# Altium PCB PCB2.PcbDoc (part 2 of 3)
Units mil, origin at the board's own origin, x right, y up, seen from the top; angles counter-clockwise.
Board outline 7178.34 x 3937 mil, 2 copper layers (Top Layer, Bottom Layer); 141 components, 57 nets, 393 pads, 76 vias.
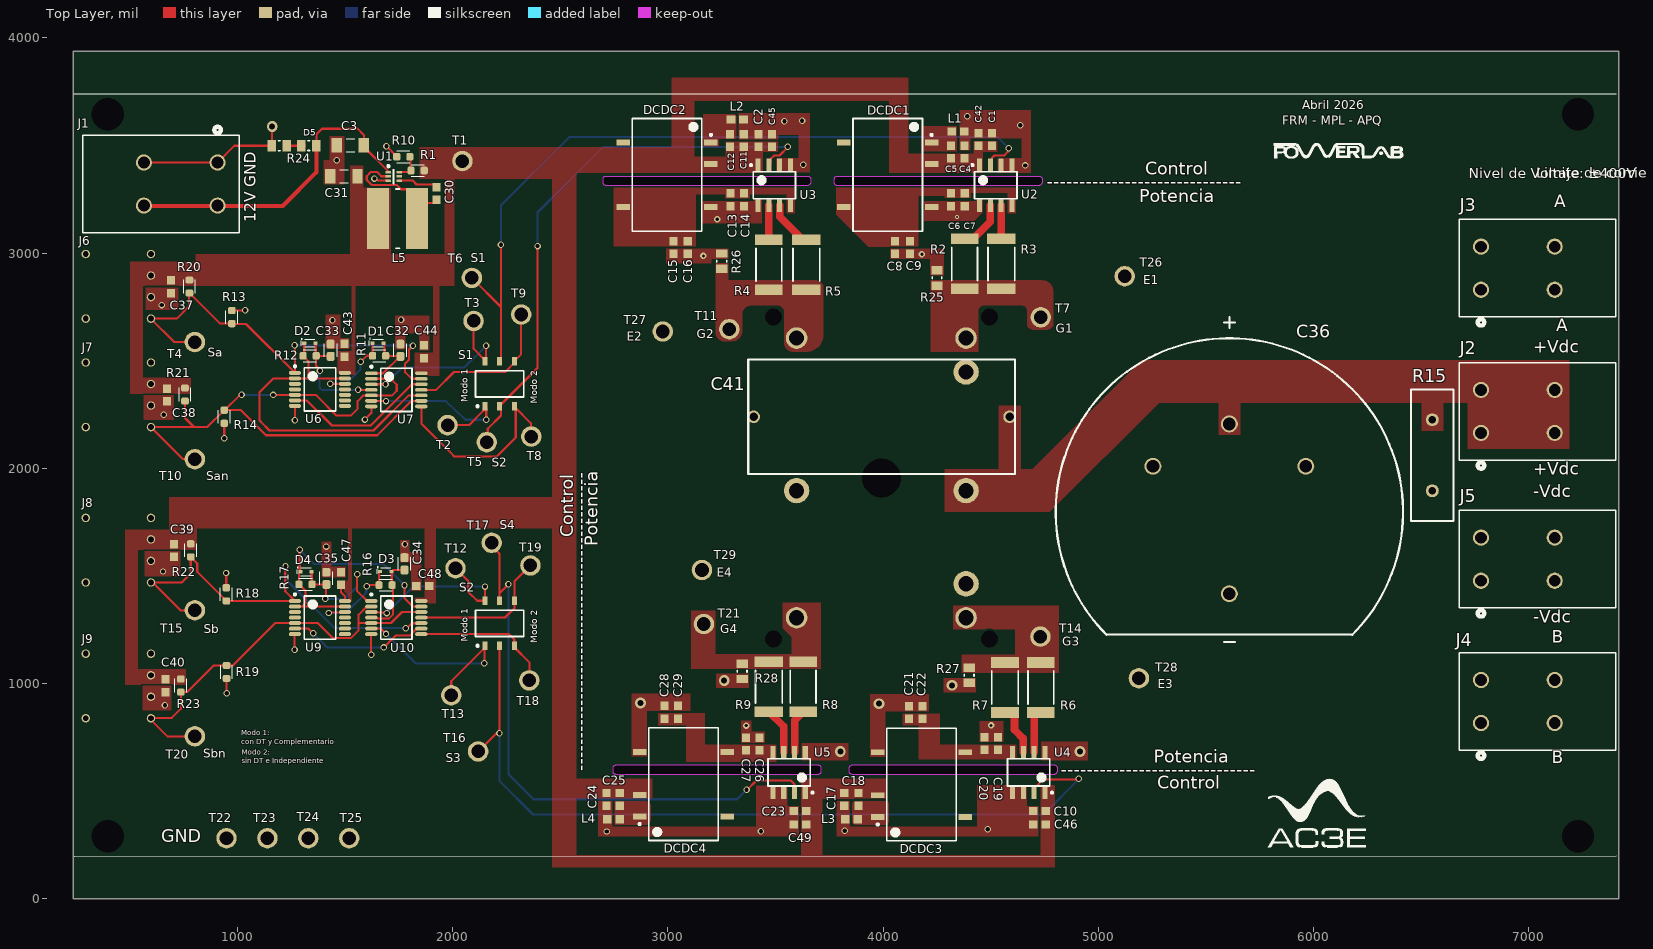
[diagram p0: Top Layer view]

## Part data (continued)
L5: library part INDUC_Murata_29332C, "Inductor Power Shielded Bobbin Core 3.3uH 10KHz 4A 0.028Ohm DCR T/R", .Max DC Current=4A, .RMS Current (Irms)=#NAME?, .Value=28mΩ, Case/Package=2828, Manufacturer="Murata Power Solutions", Manufacturer Part Number=29332C, Max Operating Temperature=85°C, Min Operating Temperature=-40°C, Supplier Part Number 1=580-29332C, Test Frequency=10kHz, Category="Fixed Inductors", China RoHS=Compliant, ComponentLink1Description=https://datasheet.octopart.com:443/29332C-Murata-Power-Solutions-datasheet-10978166.pdf?src-supplier=Newark, ComponentLink1URL=https://datasheet.octopart.com:443/29332C-Murata-Power-Solutions-datasheet-10978166.pdf?src-supplier=Newark, ComponentLink2Description=https://datasheet.octopart.com:443/29332C-Murata-Power-Solutions-datasheet-8448240.pdf?src-supplier=Newark, ComponentLink2URL=https://datasheet.octopart.com:443/29332C-Murata-Power-Solutions-datasheet-8448240.pdf?src-supplier=Newark, ComponentLink3Description=https://datasheet.octopart.com:443/29332C-Murata-Power-Solutions-datasheet-22087498.pdf?src-supplier=element14+APAC, ComponentLink3URL=https://datasheet.octopart.com:443/29332C-Murata-Power-Solutions-datasheet-22087498.pdf?src-supplier=element14+APAC, ComponentLink4Description=http://sigma.octopart.com:80/reach_statement/Murata-company-16.pdf?src-supplier=Compliance+Statements, ComponentLink4URL=http://sigma.octopart.com:80/reach_statement/Murata-company-16.pdf?src-supplier=Compliance+Statements, Composition=Wirewound, Current Rating=4A, DC Resistance (DCR)=28mΩ, Depth=7.2mm, Export Control Classification Number (ECCN) Code=EAR99, Harmonized Tariff Schedule (HTS) Code=8504.50.80.00, Height=4mm, Height - Seated (Max)=3.9878mm, Inductance=3.3µH, Introduction Date=2009-03-23, Lead Free="Lead Free", Length=7.2mm, Lifecycle Status=Production, Max Current Rating=4A, Max DC Current=4A, Mount="Surface Mount", Number of Circuits=1, Number of Pins=2, Number of Terminals=2, Pricing 1="1=0,55, 10=0,543, 50=0,543, 100=0,543, 1000=0,48, 10000=0,48 (USD)", Radiation Hardening=No, REACH SVHC=Yes, Resistance=28mΩ, RoHS=Compliant, Shielding=Shielded, Stock 1=1763, Supplier 1=Mouser, Termination=SMD/SMT, Width=7.2mm
R1: library part CRCW060352K3FKEA, "100mW Thick Film Resistors 75V ±1% ±100ppm/℃ 52.3kΩ 0603 Chip Resistor - Surface Mount ROHS", .Case/Package=0603, .Tolerance=1%, Manufacturer=Vishay, Max Operating Temperature=155°C, Max Power Dissipation=100mW, Min Operating Temperature=-55°C, Supplier Part Number 1=71-CRCW0603-52.3K-E3, Temperature Coefficient=100ppm/°C, Voltage Rating=75V, Case Code (Imperial)=0603, Case/Package=0603, Category="Chip SMD Resistors", China RoHS=Non-Compliant, ComponentLink1Description=https://datasheet.octopart.com:443/CRCW060352K3FKEA-Vishay-datasheet-175423584.pdf?src-supplier=IHS, ComponentLink1URL=https://datasheet.octopart.com:443/CRCW060352K3FKEA-Vishay-datasheet-175423584.pdf?src-supplier=IHS, ComponentLink2Description=https://datasheet.octopart.com:443/CRCW060352K3FKEA-Vishay-datasheet-62316122.pdf?src-supplier=Future+Electronics, ComponentLink2URL=https://datasheet.octopart.com:443/CRCW060352K3FKEA-Vishay-datasheet-62316122.pdf?src-supplier=Future+Electronics, ComponentLink3Description=https://datasheet.octopart.com:443/CRCW060352K3FKEA-Vishay-datasheet-5300368.pdf?src-supplier=Future+Electronics, ComponentLink3URL=https://datasheet.octopart.com:443/CRCW060352K3FKEA-Vishay-datasheet-5300368.pdf?src-supplier=Future+Electronics, ComponentLink4Description=https://datasheet.octopart.com:443/CRCW060352K3FKEA.-Vishay-datasheet-83961561.pdf?src-supplier=Newark, ComponentLink4URL=https://datasheet.octopart.com:443/CRCW060352K3FKEA.-Vishay-datasheet-83961561.pdf?src-supplier=Newark, ComponentLink5Description=https://datasheet.octopart.com:443/CRCW060352K3FKEA-Vishay-datasheet-66077789.pdf?src-supplier=Newark, ComponentLink5URL=https://datasheet.octopart.com:443/CRCW060352K3FKEA-Vishay-datasheet-66077789.pdf?src-supplier=Newark, ComponentLink6Description=https://datasheet.octopart.com:443/CRCW060352K3FKEA-Vishay-datasheet-11761042.pdf?src-supplier=Newark, ComponentLink6URL=https://datasheet.octopart.com:443/CRCW060352K3FKEA-Vishay-datasheet-11761042.pdf?src-supplier=Newark, ComponentLink7Description=https://datasheet.octopart.com:443/CRCW060352K3FKEA-Vishay-datasheet-11516975.pdf?src-supplier=Newark, ComponentLink7URL=https://datasheet.octopart.com:443/CRCW060352K3FKEA-Vishay-datasheet-11516975.pdf?src-supplier=Newark, ComponentLink8Description=https://datasheet.octopart.com:443/CRCW060352K3FKEA-Vishay-datasheet-159614168.pdf?src-supplier=Newark, ComponentLink8URL=https://datasheet.octopart.com:443/CRCW060352K3FKEA-Vishay-datasheet-159614168.pdf?src-supplier=Newark, ComponentLink9Description=https://datasheet.octopart.com:443/CRCW060352K3FKEA-Vishay-datasheet-33013972.pdf?src-supplier=Newark, ComponentLink9URL=https://datasheet.octopart.com:443/CRCW060352K3FKEA-Vishay-datasheet-33013972.pdf?src-supplier=Newark, ComponentLink10Description=https://datasheet.octopart.com:443/CRCW060352K3FKEA-Vishay-datasheet-21268114.pdf?src-supplier=Newark, ComponentLink10URL=https://datasheet.octopart.com:443/CRCW060352K3FKEA-Vishay-datasheet-21268114.pdf?src-supplier=Newark, ComponentLink11Description=https://datasheet.octopart.com:443/CRCW060352K3FKEA-Vishay-datasheet-21226360.pdf?src-supplier=Newark, ComponentLink11URL=https://datasheet.octopart.com:443/CRCW060352K3FKEA-Vishay-datasheet-21226360.pdf?src-supplier=Newark, ComponentLink12Description=https://datasheet.octopart.com:443/CRCW060352K3FKEA-Vishay-datasheet-62317937.pdf?src-supplier=element14+APAC, ComponentLink12URL=https://datasheet.octopart.com:443/CRCW060352K3FKEA-Vishay-datasheet-62317937.pdf?src-supplier=element14+APAC, ComponentLink13Description=https://datasheet.octopart.com:443/CRCW060352K3FKEA.-Vishay-datasheet-78776209.pdf?src-supplier=element14+APAC, ComponentLink13URL=https://datasheet.octopart.com:443/CRCW060352K3FKEA.-Vishay-datasheet-78776209.pdf?src-supplier=element14+APAC, ComponentLink14Description=https://datasheet.octopart.com:443/CRCW060352K3FKEA-Vishay-datasheet-14722531.pdf?src-supplier=element14+APAC, ComponentLink14URL=https://datasheet.octopart.com:443/CRCW060352K3FKEA-Vishay-datasheet-14722531.pdf?src-supplier=element14+APAC, ComponentLink15Description=https://datasheet.octopart.com:443/CRCW060352K3FKEA-Vishay-datasheet-5299586.pdf?src-supplier=element14+APAC, ComponentLink15URL=https://datasheet.octopart.com:443/CRCW060352K3FKEA-Vishay-datasheet-5299586.pdf?src-supplier=element14+APAC, ComponentLink16Description=https://datasheet.octopart.com:443/CRCW060352K3FKEA-Vishay-datasheet-10380026.pdf?src-supplier=element14+APAC, ComponentLink16URL=https://datasheet.octopart.com:443/CRCW060352K3FKEA-Vishay-datasheet-10380026.pdf?src-supplier=element14+APAC, ComponentLink17Description=https://datasheet.octopart.com:443/CRCW060352K3FKEA-Vishay-datasheet-137114422.pdf?src-supplier=X-ON, ComponentLink17URL=https://datasheet.octopart.com:443/CRCW060352K3FKEA-Vishay-datasheet-137114422.pdf?src-supplier=X-ON, ComponentLink18Description=https://datasheet.octopart.com:443/CRCW060352K3FKEA-Vishay-Dale-datasheet-47688880.pdf?src-supplier=RS+(Formerly+Allied+Electronics), ComponentLink18URL=https://datasheet.octopart.com:443/CRCW060352K3FKEA-Vishay-Dale-datasheet-47688880.pdf?src-supplier=RS+(Formerly+Allied+Electronics), ComponentLink19Description=https://datasheet.octopart.com:443/CRCW060352K3FKEA-Vishay-datasheet-12001583.pdf?src-supplier=RS+(Formerly+Allied+Electronics), ComponentLink19URL=https://datasheet.octopart.com:443/CRCW060352K3FKEA-Vishay-datasheet-12001583.pdf?src-supplier=RS+(Formerly+Allied+Electronics), ComponentLink20Description=https://datasheet.octopart.com:443/CRCW060352K3FKEA-Vishay-datasheet-5306405.pdf?src-supplier=RS+(Formerly+Allied+Electronics), ComponentLink20URL=https://datasheet.octopart.com:443/CRCW060352K3FKEA-Vishay-datasheet-5306405.pdf?src-supplier=RS+(Formerly+Allied+Electronics), ComponentLink21Description=https://datasheet.octopart.com:443/CRCW060352K3FKEA-Vishay-datasheet-8619608.pdf?src-supplier=element14, ComponentLink21URL=https://datasheet.octopart.com:443/CRCW060352K3FKEA-Vishay-datasheet-8619608.pdf?src-supplier=element14, ComponentLink22Description=https://datasheet.octopart.com:443/CRCW060352K3FKEA-Vishay-datasheet-5377433.pdf?src-supplier=Garrett, ComponentLink22URL=https://datasheet.octopart.com:443/CRCW060352K3FKEA-Vishay-datasheet-5377433.pdf?src-supplier=Garrett, ComponentLink23Description=https://datasheet.octopart.com:443/CRCW060352K3FKEA-Vishay-datasheet-148188.pdf?src-supplier=Garrett, ComponentLink23URL=https://datasheet.octopart.com:443/CRCW060352K3FKEA-Vishay-datasheet-148188.pdf?src-supplier=Garrett, ComponentLink24Description=https://datasheet.octopart.com:443/CRCW060352K3FKEA-Vishay-datasheet-30224.pdf?src-supplier=Garrett, ComponentLink24URL=https://datasheet.octopart.com:443/CRCW060352K3FKEA-Vishay-datasheet-30224.pdf?src-supplier=Garrett, ComponentLink25Description=http://sigma.octopart.com:80/rohs_statement/Vishay-company-15.pdf?src-supplier=Compliance+Statements, ComponentLink25URL=http://sigma.octopart.com:80/rohs_statement/Vishay-company-15.pdf?src-supplier=Compliance+Statements, Composition="Thick Film", Contact Plating=Tin, Country of Origin="Israel, Taiwan", Depth=850µm, Export Control Classification Number (ECCN) Code=EAR99, Features="Automotive AEC-Q200", Harmonized Tariff Schedule (HTS) Code=8533.21.00.30, Height=450µm, Introduction Date=2005-02-16, Lead Free="Lead Free", Length=1.55mm, Lifecycle Status=Production, Manufacturer Part Number=CRCW060352K3FKEA, Military Standard=Not, Mount="Surface Mount", Number of Pins=2, Number of Terminals=2, Number of Terminations=2, Packaging="Cut Tape", Power Dissipation=100mW, Power Rating=100mW, Pricing 1="1=0,1, 10=0,019, 50=0,019, 100=0,015, 1000=0,009, 10000=0,004 (USD)", Radiation Hardening=No, REACH SVHC=Yes, Resistance=52.3kΩ, RoHS=Compliant, Schedule B="8533210045, 8533210045|8533210045, 8533210045|8533210045|8533210045, 8533210045|8533210045|8533210045|8533210045", Stock 1=40752, Supplier 1=Mouser, Termination=SMD/SMT, Tolerance=1%, Weight=2.012816mg, Width=850µm, Working Voltage=75V
R2 R4 R6 R8: library part SR2512JK-0710RL, "Fixed Resistor, Metal Glaze/thick Film, 1W, 10ohm, 500V, 5% +/-Tol, 100ppm/Cel, Surface Mount, 2512", .Case/Package=2512, .Tolerance=5%, Manufacturer="Yageo Group", Max Operating Temperature=155°C, Max Power Dissipation=1W, Min Operating Temperature=-55°C, Supplier Part Number 1=603-SR2512JK-0710RL, Temperature Coefficient=100ppm/°C, Working Voltage=500V, Case/Package=2512, Category="Chip SMD Resistors", China RoHS=Non-Compliant, ComponentLink1Description=https://datasheet.octopart.com:443/SR2512JK-0710RL-Yageo-datasheet-176402240.pdf?src-supplier=Newark, ComponentLink1URL=https://datasheet.octopart.com:443/SR2512JK-0710RL-Yageo-datasheet-176402240.pdf?src-supplier=Newark, ComponentLink2Description=https://datasheet.octopart.com:443/SR2512JK-0710RL-Yageo-datasheet-166006509.pdf?src-supplier=Future+Electronics, ComponentLink2URL=https://datasheet.octopart.com:443/SR2512JK-0710RL-Yageo-datasheet-166006509.pdf?src-supplier=Future+Electronics, ComponentLink3Description=https://datasheet.octopart.com/SR2512JK-0710RL-Yageo-datasheet-11047080.pdf, ComponentLink3URL=https://datasheet.octopart.com/SR2512JK-0710RL-Yageo-datasheet-11047080.pdf, ComponentLink4Description=http://sigma.octopart.com:80/conflict_mineral_statement/Yageo-company-3.pdf?src-supplier=Compliance+Statements, ComponentLink4URL=http://sigma.octopart.com:80/conflict_mineral_statement/Yageo-company-3.pdf?src-supplier=Compliance+Statements, ComponentLink5Description=http://sigma.octopart.com:80/rohs_statement/Yageo-company-2.pdf?src-supplier=Compliance+Statements, ComponentLink5URL=http://sigma.octopart.com:80/rohs_statement/Yageo-company-2.pdf?src-supplier=Compliance+Statements, Composition="Thick Film", Features="Automotive AEC-Q200", Height=550µm, Length=6.35mm, Lifecycle Status=Production, Manufacturer Part Number=SR2512JK-0710RL, Mount="Surface Mount", Number of Terminals=2, Number of Terminations=2, Power Dissipation=1W, Pricing 1="1=0,17, 10=0,099, 50=0,089, 100=0,08, 1000=0,069, 10000=0,069 (USD)", REACH SVHC=Yes, Resistance=10Ω, RoHS=Compliant, Stock 1=10268, Supplier 1=Mouser, Tolerance=5%, Width=3.1mm
R3 R5 R7 R9: library part RMC1-3R30FTE, "Fixed Resistor, Metal Glaze/thick Film, 1W, 3.3ohm, 200V, 1% +/-Tol, 500ppm/Cel, Surface Mount, 2512", .Case/Package=2512, .Tolerance=1%, Manufacturer=Kamaya, Max Operating Temperature=155°C, Min Operating Temperature=-55°C, Power Dissipation=1W, Supplier Part Number 1=791-RMC1-3R30FTE, Temperature Coefficient=500ppm/°C, Working Voltage=200V, Case/Package=2512, Category="Chip SMD Resistors", China RoHS=Non-Compliant, ComponentLink1Description=https://datasheet.octopart.com:443/RMC1-3R30FTE-Kamaya-datasheet-182142873.pdf?src-supplier=IHS, ComponentLink1URL=https://datasheet.octopart.com:443/RMC1-3R30FTE-Kamaya-datasheet-182142873.pdf?src-supplier=IHS, Height=550µm, Lifecycle Status=Production, Manufacturer Part Number=RMC1-3R30FTE, Mount="Surface Mount", Number of Terminals=2, Pricing 1="1=0,2, 10=0,097, 50=0,097, 100=0,056, 1000=0,034, 10000=0,024 (USD)", REACH SVHC=Yes, Resistance=3.3Ω, RoHS=Compliant, Stock 1=1779, Supplier 1=Mouser, Tolerance=1%, Width=3.2mm
R10: library part "RESISTOR - GENERIC", "Chip Resistor Automotive Precision Grade Thick Film 0603 10kOhm 0.5% Paper T/R", .Case/Package=0603, .Tolerance=0.5%, Manufacturer="Yageo Group", Manufacturer Part Number=AC0603DRE0710KL, Max Operating Temperature=155°C, Min Operating Temperature=-55°C, Power Dissipation=100mW, Supplier Part Number 1=603-AC0603DRE0710KL, Temperature Coefficient=50ppm/°C, Working Voltage=75V, Case/Package=0603, Category="Chip SMD Resistors", China RoHS=Non-Compliant, ComponentLink1Description=https://datasheet.octopart.com:443/AC0603DRE0710KL-Yageo-datasheet-182189378.pdf?src-supplier=IHS, ComponentLink1URL=https://datasheet.octopart.com:443/AC0603DRE0710KL-Yageo-datasheet-182189378.pdf?src-supplier=IHS, ComponentLink2Description=https://datasheet.octopart.com:443/AC0603DRE0710KL-Yageo-datasheet-178509465.pdf?src-supplier=Newark, ComponentLink2URL=https://datasheet.octopart.com:443/AC0603DRE0710KL-Yageo-datasheet-178509465.pdf?src-supplier=Newark, ComponentLink3Description=https://datasheet.octopart.com/AC0603DRE0710KL-Yageo-datasheet-12512238.pdf, ComponentLink3URL=https://datasheet.octopart.com/AC0603DRE0710KL-Yageo-datasheet-12512238.pdf, ComponentLink4Description=http://sigma.octopart.com:80/conflict_mineral_statement/Yageo-company-3.pdf?src-supplier=Compliance+Statements, ComponentLink4URL=http://sigma.octopart.com:80/conflict_mineral_statement/Yageo-company-3.pdf?src-supplier=Compliance+Statements, ComponentLink5Description=http://sigma.octopart.com:80/rohs_statement/Yageo-company-2.pdf?src-supplier=Compliance+Statements, ComponentLink5URL=http://sigma.octopart.com:80/rohs_statement/Yageo-company-2.pdf?src-supplier=Compliance+Statements, Country of Origin="Mainland China, Taiwan", Export Control Classification Number (ECCN) Code=EAR99, Harmonized Tariff Schedule (HTS) Code=8533.21.00.30, Height=450µm, Introduction Date=2016-03-14, Length=1.6mm, Lifecycle Status=Production, Mount="Surface Mount", Number of Terminals=2, Packaging="Tape & Reel", Pricing 1="1=0,11, 10=0,061, 50=0,061, 100=0,045, 1000=0,031, 10000=0,02 (USD)", REACH SVHC=Yes, Resistance=10kΩ, RoHS=Compliant, Stock 1=3496, Supplier 1=Mouser, Tolerance=0.5%, Width=800µm
R11 R12 R16 R17: library part "RESISTOR - GENERIC", "Res Thick Film 0603 3.09K Ohm 1% 0.1W(1/10W) ±100ppm/C Pad SMD T/R", .Case/Package=0603, .Tolerance=1%, Manufacturer="Yageo Group", Manufacturer Part Number=RC0603FR-073K09L, Max Operating Temperature=155°C, Min Operating Temperature=-55°C, Power Dissipation=100mW, Supplier Part Number 1=603-RC0603FR-073K09L, Temperature Coefficient=100ppm/°C, Voltage Rating=75V, Voltage Rating (DC)=50V, Case Code (Imperial)=0603, Case/Package=0603, Category="Chip SMD Resistors", China RoHS=Non-Compliant, ComponentLink1Description=https://datasheet.octopart.com:443/RC0603FR-073K09L-Yageo-datasheet-175887523.pdf?src-supplier=Newark, ComponentLink1URL=https://datasheet.octopart.com:443/RC0603FR-073K09L-Yageo-datasheet-175887523.pdf?src-supplier=Newark, ComponentLink2Description=https://datasheet.octopart.com:443/RC0603FR-073K09L-Yageo-datasheet-103092701.pdf?src-supplier=Upverter, ComponentLink2URL=https://datasheet.octopart.com:443/RC0603FR-073K09L-Yageo-datasheet-103092701.pdf?src-supplier=Upverter, ComponentLink3Description=https://datasheet.octopart.com:443/RC0603FR-073K09L-Yageo-datasheet-164759695.pdf?src-supplier=Future+Electronics, ComponentLink3URL=https://datasheet.octopart.com:443/RC0603FR-073K09L-Yageo-datasheet-164759695.pdf?src-supplier=Future+Electronics, ComponentLink4Description=https://datasheet.octopart.com:443/RC0603FR-073K09L-Yageo-datasheet-137700087.pdf?src-supplier=Future+Electronics, ComponentLink4URL=https://datasheet.octopart.com:443/RC0603FR-073K09L-Yageo-datasheet-137700087.pdf?src-supplier=Future+Electronics, ComponentLink5Description=https://datasheet.octopart.com:443/RC0603FR-073K09L-Yageo-datasheet-15599030.pdf?src-supplier=Future+Electronics, ComponentLink5URL=https://datasheet.octopart.com:443/RC0603FR-073K09L-Yageo-datasheet-15599030.pdf?src-supplier=Future+Electronics, ComponentLink6Description=https://datasheet.octopart.com:443/RC0603FR-073K09L-Yageo-datasheet-12596169.pdf?src-supplier=Future+Electronics, ComponentLink6URL=https://datasheet.octopart.com:443/RC0603FR-073K09L-Yageo-datasheet-12596169.pdf?src-supplier=Future+Electronics, ComponentLink7Description=https://datasheet.octopart.com:443/RC0603FR-073K09L-Yageo-datasheet-8328172.pdf?src-supplier=Future+Electronics, ComponentLink7URL=https://datasheet.octopart.com:443/RC0603FR-073K09L-Yageo-datasheet-8328172.pdf?src-supplier=Future+Electronics, ComponentLink8Description=https://datasheet.octopart.com:443/RC0603FR-073K09L-Yageo-datasheet-8324193.pdf?src-supplier=Future+Electronics, ComponentLink8URL=https://datasheet.octopart.com:443/RC0603FR-073K09L-Yageo-datasheet-8324193.pdf?src-supplier=Future+Electronics, ComponentLink9Description=https://datasheet.octopart.com/RC0603FR-073K09L-Yageo-datasheet-73766026.pdf, ComponentLink9URL=https://datasheet.octopart.com/RC0603FR-073K09L-Yageo-datasheet-73766026.pdf, ComponentLink10Description=https://datasheet.octopart.com:443/RC0603FR-073K09L-Yageo-datasheet-118562.pdf?src-supplier=DigiKey, ComponentLink10URL=https://datasheet.octopart.com:443/RC0603FR-073K09L-Yageo-datasheet-118562.pdf?src-supplier=DigiKey, ComponentLink11Description=http://sigma.octopart.com:80/conflict_mineral_statement/Yageo-company-3.pdf?src-supplier=Compliance+Statements, ComponentLink11URL=http://sigma.octopart.com:80/conflict_mineral_statement/Yageo-company-3.pdf?src-supplier=Compliance+Statements, ComponentLink12Description=http://sigma.octopart.com:80/rohs_statement/Yageo-company-2.pdf?src-supplier=Compliance+Statements, ComponentLink12URL=http://sigma.octopart.com:80/rohs_statement/Yageo-company-2.pdf?src-supplier=Compliance+Statements, Composition="Thick Film", Depth=800µm, Height=450µm, Lead Free="Lead Free", Length=1.6mm, Lifecycle Status=Production, Military Standard=Not, Mount="Surface Mount", Number of Terminals=2, Packaging="Tape & Reel", Power Rating=100mW, Pricing 1="1=0,1, 10=0,007, 50=0,007, 100=0,006, 1000=0,006, 10000=0,002 (USD)", REACH SVHC=Yes, Resistance=3.09kΩ, RoHS=Compliant, Schedule B="8533210045, 8533210045|8533210045|8533210045|8533210045|8533210045", Stock 1=1028569, Supplier 1=Mouser, Termination=SMD/SMT, Tolerance=1%, Width=800µm, Working Voltage=75V
R13 R14 R18 R19: library part RC0603JR-0710KL, "Res Thick Film 0603 10K Ohm 5% 1/10W ±100ppm/°C Molded SMD SMD Paper T/R", .Case/Package=0603, .Tolerance=5%, Manufacturer="Yageo Group", Max Operating Temperature=155°C, Min Operating Temperature=-55°C, Power Dissipation=100mW, Supplier Part Number 1=603-RC0603JR-0710KL, Temperature Coefficient=100ppm/°C, Voltage Rating=50V, Working Voltage=75V, Case Code (Imperial)=0603, Case/Package=0603, Category="Chip SMD Resistors", China RoHS=Non-Compliant, ComponentLink1Description=https://datasheet.octopart.com:443/RC0603JR-0710KL-Yageo-datasheet-175887523.pdf?src-supplier=IHS, ComponentLink1URL=https://datasheet.octopart.com:443/RC0603JR-0710KL-Yageo-datasheet-175887523.pdf?src-supplier=IHS, ComponentLink2Description=https://datasheet.octopart.com:443/RC0603JR-0710KL-Yageo-datasheet-8328172.pdf?src-supplier=element14+APAC, ComponentLink2URL=https://datasheet.octopart.com:443/RC0603JR-0710KL-Yageo-datasheet-8328172.pdf?src-supplier=element14+APAC, ComponentLink3Description=https://datasheet.octopart.com:443/RC0603JR-0710KL-Yageo-datasheet-62067350.pdf?src-supplier=element14+APAC, ComponentLink3URL=https://datasheet.octopart.com:443/RC0603JR-0710KL-Yageo-datasheet-62067350.pdf?src-supplier=element14+APAC, ComponentLink4Description=https://datasheet.octopart.com:443/RC0603JR-0710KL-Yageo-datasheet-77992522.pdf?src-supplier=Upverter, ComponentLink4URL=https://datasheet.octopart.com:443/RC0603JR-0710KL-Yageo-datasheet-77992522.pdf?src-supplier=Upverter, ComponentLink5Description=https://datasheet.octopart.com:443/RC0603JR-0710KL-Yageo-datasheet-34211833.pdf?src-supplier=Newark, ComponentLink5URL=https://datasheet.octopart.com:443/RC0603JR-0710KL-Yageo-datasheet-34211833.pdf?src-supplier=Newark, ComponentLink6Description=https://datasheet.octopart.com:443/RC0603JR-0710KL-Yageo-datasheet-164759695.pdf?src-supplier=Future+Electronics, ComponentLink6URL=https://datasheet.octopart.com:443/RC0603JR-0710KL-Yageo-datasheet-164759695.pdf?src-supplier=Future+Electronics, ComponentLink7Description=https://datasheet.octopart.com:443/RC0603JR-0710KL-Yageo-datasheet-137700087.pdf?src-supplier=Future+Electronics, ComponentLink7URL=https://datasheet.octopart.com:443/RC0603JR-0710KL-Yageo-datasheet-137700087.pdf?src-supplier=Future+Electronics, ComponentLink8Description=https://datasheet.octopart.com:443/RC0603JR0710KL-Yageo-datasheet-27584510.pdf?src-supplier=Future+Electronics, ComponentLink8URL=https://datasheet.octopart.com:443/RC0603JR0710KL-Yageo-datasheet-27584510.pdf?src-supplier=Future+Electronics, ComponentLink9Description=https://datasheet.octopart.com:443/RC0603JR-0710KL-Yageo-datasheet-15599030.pdf?src-supplier=Future+Electronics, ComponentLink9URL=https://datasheet.octopart.com:443/RC0603JR-0710KL-Yageo-datasheet-15599030.pdf?src-supplier=Future+Electronics, ComponentLink10Description=https://datasheet.octopart.com:443/RC0603JR0710KL-Yageo-datasheet-12596169.pdf?src-supplier=Future+Electronics, ComponentLink10URL=https://datasheet.octopart.com:443/RC0603JR0710KL-Yageo-datasheet-12596169.pdf?src-supplier=Future+Electronics, ComponentLink11Description=https://datasheet.octopart.com:443/RC0603JR-0710KL-Yageo-datasheet-8324193.pdf?src-supplier=Future+Electronics, ComponentLink11URL=https://datasheet.octopart.com:443/RC0603JR-0710KL-Yageo-datasheet-8324193.pdf?src-supplier=Future+Electronics, ComponentLink12Description=https://datasheet.octopart.com/RC0603JR-0710KL-Yageo-datasheet-73766026.pdf, ComponentLink12URL=https://datasheet.octopart.com/RC0603JR-0710KL-Yageo-datasheet-73766026.pdf, ComponentLink13Description=https://datasheet.octopart.com:443/RC0603JR-0710KL-Yageo-datasheet-118562.pdf?src-supplier=DigiKey, ComponentLink13URL=https://datasheet.octopart.com:443/RC0603JR-0710KL-Yageo-datasheet-118562.pdf?src-supplier=DigiKey, ComponentLink14Description=http://sigma.octopart.com:80/conflict_mineral_statement/Yageo-company-3.pdf?src-supplier=Compliance+Statements, ComponentLink14URL=http://sigma.octopart.com:80/conflict_mineral_statement/Yageo-company-3.pdf?src-supplier=Compliance+Statements, ComponentLink15Description=http://sigma.octopart.com:80/rohs_statement/Yageo-company-2.pdf?src-supplier=Compliance+Statements, ComponentLink15URL=http://sigma.octopart.com:80/rohs_statement/Yageo-company-2.pdf?src-supplier=Compliance+Statements, Composition="Thick Film", Contact Plating=Tin, Depth=800µm, Height=450µm, Lead Free="Lead Free", Length=1.6mm, Lifecycle Status=Production, Manufacturer Part Number=RC0603JR-0710KL, Military Standard=Not, Mount="Surface Mount", Number of Pins=2, Number of Terminals=2, Packaging="Tape & Reel", Power Rating=100mW, Pricing 1="1=0,1, 10=0,008, 50=0,008, 100=0,006, 1000=0,005, 10000=0,002 (USD)", Radiation Hardening=No, REACH SVHC=Yes, Resistance=10kΩ, RoHS=Compliant, Schedule B="8533210045, 8533210045|8533210045|8533210045|8533210045|8533210045|8533210045|8533210045|8533210045|8533210045|8533210045|8533210045|8533210045|8533210045|8533210045, 8533210045|8533210045|8533210045|8533210045|8533210045|8533210045|8533210045|8533210045|8533210045|8533210045|8533210045|8533210045|8533210045|8533210045|8533210045, 8533210045|8533210045|8533210045|8533210045|8533210045|8533210045|8533210045|8533210045|8533210045|8533210045|8533210045|8533210045|8533210045|8533210045|8533210045|8533210045", Stock 1=1014331, Supplier 1=Mouser, Termination=SMD/SMT, Tolerance=5%, Voltage Rating (AC)=50V, Voltage Rating (DC)=50V, Width=800µm
R15: library part MFR200FRF73-100K, "Fixed Resistor, Metal Film, 2W, 100000ohm, 500V, 1% +/-Tol, 100ppm/Cel, Through Hole Mount", .Case/Package=Metal, .Tolerance=1%, Manufacturer="Yageo Group", Max Operating Temperature=155°C, Min Operating Temperature=-55°C, Power Dissipation=2W, Supplier Part Number 1=603-MFR200FRF73-100K, Temperature Coefficient=100ppm/°C, Voltage Rating (DC)=500V, Case/Package=Metal, Category="Through-Hole Resistors", China RoHS=Compliant, ComponentLink1Description=https://datasheet.octopart.com:443/MFR200FRF73-100K-Yageo-datasheet-175665672.pdf?src-supplier=IHS, ComponentLink1URL=https://datasheet.octopart.com:443/MFR200FRF73-100K-Yageo-datasheet-175665672.pdf?src-supplier=IHS, ComponentLink2Description=https://datasheet.octopart.com/MFR200FRF73-100K-Yageo-datasheet-28066692.pdf, ComponentLink2URL=https://datasheet.octopart.com/MFR200FRF73-100K-Yageo-datasheet-28066692.pdf, ComponentLink3Description=http://sigma.octopart.com:80/conflict_mineral_statement/Yageo-company-3.pdf?src-supplier=Compliance+Statements, ComponentLink3URL=http://sigma.octopart.com:80/conflict_mineral_statement/Yageo-company-3.pdf?src-supplier=Compliance+Statements, ComponentLink4Description=http://sigma.octopart.com:80/rohs_statement/Yageo-company-2.pdf?src-supplier=Compliance+Statements, ComponentLink4URL=http://sigma.octopart.com:80/rohs_statement/Yageo-company-2.pdf?src-supplier=Compliance+Statements, Country of Origin="Mainland China", Diameter=5mm, Export Control Classification Number (ECCN) Code=EAR99, Harmonized Tariff Schedule (HTS) Code=8533.21.00.90, Introduction Date=2010-12-31, Lead Diameter=800µm, Length=15.5mm, Lifecycle Status=Production, Manufacturer Part Number=MFR200FRF73-100K, Number of Terminals=2, Packaging="Tape and Reel", Power Rating=2W, Pricing 1="1=0,39, 10=0,285, 50=0,217, 100=0,128, 1000=0,079, 10000=0,064 (USD)", REACH SVHC=Yes, Resistance=100kΩ, RoHS=Compliant, Stock 1=2527, Supplier 1=Mouser, Termination=Axial, Tolerance=1%, Working Voltage=500V
R20 R21 R22 R23: library part RC0603FR-071KL, "Fixed Resistor, Metal Glaze/Thick Film, 0.1W, 1000ohm, 75V, 1% +/-Tol, Surface Mount, 0603", .Case/Package=0603, .Tolerance=1%, Manufacturer="Yageo Group", Max Operating Temperature=155°C, Min Operating Temperature=-55°C, Power Dissipation=100mW, Supplier Part Number 1=603-RC0603FR-071KL, Temperature Coefficient=100ppm/°C, Voltage Rating=50V, Working Voltage=75V, Case Code (Imperial)=0603, Case Code (Metric)=0603, Case/Package=0603, Category="Chip SMD Resistors", China RoHS=Non-Compliant, ComponentLink1Description=https://datasheet.octopart.com:443/RC0603FR-071KL-Yageo-datasheet-175887523.pdf?src-supplier=Newark, ComponentLink1URL=https://datasheet.octopart.com:443/RC0603FR-071KL-Yageo-datasheet-175887523.pdf?src-supplier=Newark, ComponentLink2Description=https://datasheet.octopart.com:443/RC0603FR-071KL-Yageo-datasheet-34211833.pdf?src-supplier=Newark, ComponentLink2URL=https://datasheet.octopart.com:443/RC0603FR-071KL-Yageo-datasheet-34211833.pdf?src-supplier=Newark, ComponentLink3Description=https://datasheet.octopart.com:443/RC0603FR-071KL-Yageo-datasheet-12596169.pdf?src-supplier=Newark, ComponentLink3URL=https://datasheet.octopart.com:443/RC0603FR-071KL-Yageo-datasheet-12596169.pdf?src-supplier=Newark, ComponentLink4Description=https://datasheet.octopart.com:443/RC0603FR-071KL-Yageo-datasheet-499455.pdf?src-supplier=Newark, ComponentLink4URL=https://datasheet.octopart.com:443/RC0603FR-071KL-Yageo-datasheet-499455.pdf?src-supplier=Newark, ComponentLink5Description=https://datasheet.octopart.com:443/RC0603FR-071KL-Yageo-datasheet-503470.pdf?src-supplier=Newark, ComponentLink5URL=https://datasheet.octopart.com:443/RC0603FR-071KL-Yageo-datasheet-503470.pdf?src-supplier=Newark, ComponentLink6Description=https://datasheet.octopart.com:443/RC0603FR-071KL-Yageo-datasheet-62067350.pdf?src-supplier=element14+APAC, ComponentLink6URL=https://datasheet.octopart.com:443/RC0603FR-071KL-Yageo-datasheet-62067350.pdf?src-supplier=element14+APAC, ComponentLink7Description=https://datasheet.octopart.com:443/RC0603FR-071KL-Yageo-datasheet-21426514.pdf?src-supplier=element14+APAC, ComponentLink7URL=https://datasheet.octopart.com:443/RC0603FR-071KL-Yageo-datasheet-21426514.pdf?src-supplier=element14+APAC, ComponentLink8Description=https://datasheet.octopart.com:443/RC0603FR-071KL-Yageo-datasheet-141265859.pdf?src-supplier=Upverter, ComponentLink8URL=https://datasheet.octopart.com:443/RC0603FR-071KL-Yageo-datasheet-141265859.pdf?src-supplier=Upverter, ComponentLink9Description=https://datasheet.octopart.com:443/RC0603FR-071KL-Yageo-datasheet-103092701.pdf?src-supplier=Upverter, ComponentLink9URL=https://datasheet.octopart.com:443/RC0603FR-071KL-Yageo-datasheet-103092701.pdf?src-supplier=Upverter, ComponentLink10Description=https://sigma.octopart.com:443/138820526/technical_drawing/Yageo-RC0603FR-071KL.pdf?src-supplier=Upverter, ComponentLink10URL=https://sigma.octopart.com:443/138820526/technical_drawing/Yageo-RC0603FR-071KL.pdf?src-supplier=Upverter, ComponentLink11Description=https://datasheet.octopart.com:443/RC0603FR-071KL-Yageo-datasheet-68297981.pdf?src-supplier=Upverter, ComponentLink11URL=https://datasheet.octopart.com:443/RC0603FR-071KL-Yageo-datasheet-68297981.pdf?src-supplier=Upverter, ComponentLink12Description=https://datasheet.octopart.com:443/RC0603FR-071KL-Yageo-datasheet-8328172.pdf?src-supplier=Farnell, ComponentLink12URL=https://datasheet.octopart.com:443/RC0603FR-071KL-Yageo-datasheet-8328172.pdf?src-supplier=Farnell, ComponentLink13Description=https://datasheet.octopart.com:443/RC0603FR-071KL-Yageo-datasheet-13691069.pdf?src-supplier=Farnell, ComponentLink13URL=https://datasheet.octopart.com:443/RC0603FR-071KL-Yageo-datasheet-13691069.pdf?src-supplier=Farnell, ComponentLink14Description=https://datasheet.octopart.com:443/RC0603FR-071KL-Yageo-datasheet-15599030.pdf?src-supplier=Seeed+Studio, ComponentLink14URL=https://datasheet.octopart.com:443/RC0603FR-071KL-Yageo-datasheet-15599030.pdf?src-supplier=Seeed+Studio, ComponentLink15Description=https://datasheet.octopart.com:443/RC0603FR-071KL-Yageo-Group-datasheet-176638170.pdf?src-supplier=Future+Electronics, ComponentLink15URL=https://datasheet.octopart.com:443/RC0603FR-071KL-Yageo-Group-datasheet-176638170.pdf?src-supplier=Future+Electronics, ComponentLink16Description=https://datasheet.octopart.com:443/RC0603FR-071KL-Yageo-datasheet-164759695.pdf?src-supplier=Future+Electronics, ComponentLink16URL=https://datasheet.octopart.com:443/RC0603FR-071KL-Yageo-datasheet-164759695.pdf?src-supplier=Future+Electronics, ComponentLink17Description=https://datasheet.octopart.com:443/RC0603FR-071KL-Yageo-datasheet-137700087.pdf?src-supplier=Future+Electronics, ComponentLink17URL=https://datasheet.octopart.com:443/RC0603FR-071KL-Yageo-datasheet-137700087.pdf?src-supplier=Future+Electronics, ComponentLink18Description=https://datasheet.octopart.com:443/RC0603FR071KL-Yageo-datasheet-27584510.pdf?src-supplier=Future+Electronics, ComponentLink18URL=https://datasheet.octopart.com:443/RC0603FR071KL-Yageo-datasheet-27584510.pdf?src-supplier=Future+Electronics, ComponentLink19Description=https://datasheet.octopart.com:443/RC0603FR-071KL-Yageo-datasheet-8324193.pdf?src-supplier=Future+Electronics, ComponentLink19URL=https://datasheet.octopart.com:443/RC0603FR-071KL-Yageo-datasheet-8324193.pdf?src-supplier=Future+Electronics, ComponentLink20Description=https://datasheet.octopart.com:443/RC0603FR-071KL-Yageo-datasheet-79472498.pdf?src-supplier=Megastar, ComponentLink20URL=https://datasheet.octopart.com:443/RC0603FR-071KL-Yageo-datasheet-79472498.pdf?src-supplier=Megastar, ComponentLink21Description=https://datasheet.octopart.com/RC0603FR-071KL-Yageo-datasheet-73766026.pdf, ComponentLink21URL=https://datasheet.octopart.com/RC0603FR-071KL-Yageo-datasheet-73766026.pdf, ComponentLink22Description=https://datasheet.octopart.com:443/RC0603FR-071KL-Yageo-datasheet-118562.pdf?src-supplier=DigiKey, ComponentLink22URL=https://datasheet.octopart.com:443/RC0603FR-071KL-Yageo-datasheet-118562.pdf?src-supplier=DigiKey, ComponentLink23Description=http://sigma.octopart.com:80/conflict_mineral_statement/Yageo-company-3.pdf?src-supplier=Compliance+Statements, ComponentLink23URL=http://sigma.octopart.com:80/conflict_mineral_statement/Yageo-company-3.pdf?src-supplier=Compliance+Statements, ComponentLink24Description=http://sigma.octopart.com:80/rohs_statement/Yageo-company-2.pdf?src-supplier=Compliance+Statements, ComponentLink24URL=http://sigma.octopart.com:80/rohs_statement/Yageo-company-2.pdf?src-supplier=Compliance+Statements, Composition="Thick Film", Contact Plating=Tin, Country of Origin="Mainland China, Taiwan", Depth=800µm, Export Control Classification Number (ECCN) Code=EAR99, Harmonized Tariff Schedule (HTS) Code=8533.21.00.30, Height=450µm, Introduction Date=2004-10-04, Lead Free="Lead Free", Length=1.6mm, Lifecycle Status=Production, Manufacturer Part Number=RC0603FR-071KL, Military Standard=Not, Mount="Surface Mount", Number of Pins=2, Number of Terminals=2, Packaging="Tape and Reel", Power Rating=100mW, Pricing 1="1=0,1, 10=0,007, 50=0,007, 100=0,006, 1000=0,006, 10000=0,002 (USD)", Radiation Hardening=No, REACH SVHC=Yes, Resistance=1kΩ, RoHS=Compliant, Schedule B="8533210045, 8533210045|8533210045|8533210045|8533210045|8533210045|8533210045|8533210045|8533210045|8533210045|8533210045|8533210045|8533210045|8533210045|8533210045|8533210045|8533210045|8533210045|8533210045|8533210045|8533210045|8533210045|8533210045|8533210045|85", Stock 1=9866215, Supplier 1=Mouser, Termination=SMD/SMT, Tolerance=1%, Voltage Rating (DC)=50V, Width=800µm
R25 R26 R27 R28: library part AA0805FR-0710KL, "Fixed Resistor, Metal Glaze/thick Film, 0.125W, 10000ohm, 150V, 1% +/-Tol, 150ppm/Cel, Surface Mount, 0805", .Case/Package=0805, .Tolerance=1%, Case Code (Metric)=2012, Manufacturer="Yageo Group", Max Operating Temperature=155°C, Max Power Dissipation=125mW, Min Operating Temperature=-55°C, Temperature Coefficient=100ppm/°C, Voltage Rating=150V, Case Code (Imperial)=0805, Case/Package=0805, Category="Chip SMD Resistors", China RoHS=Non-Compliant, ComponentLink1Description=https://datasheet.octopart.com:443/RC0805JR-101KL-Yageo-datasheet-175887523.pdf?src-supplier=IHS, ComponentLink1URL=https://datasheet.octopart.com:443/RC0805JR-101KL-Yageo-datasheet-175887523.pdf?src-supplier=IHS, ComponentLink2Description=https://datasheet.octopart.com:443/RC0805JR-101KL-Yageo-datasheet-8330313.pdf?src-supplier=element14+APAC, ComponentLink2URL=https://datasheet.octopart.com:443/RC0805JR-101KL-Yageo-datasheet-8330313.pdf?src-supplier=element14+APAC, ComponentLink3Description=https://datasheet.octopart.com/RC0805JR-101KL-Yageo-datasheet-73766026.pdf, ComponentLink3URL=https://datasheet.octopart.com/RC0805JR-101KL-Yageo-datasheet-73766026.pdf, ComponentLink4Description=http://sigma.octopart.com:80/conflict_mineral_statement/Yageo-company-3.pdf?src-supplier=Compliance+Statements, ComponentLink4URL=http://sigma.octopart.com:80/conflict_mineral_statement/Yageo-company-3.pdf?src-supplier=Compliance+Statements, ComponentLink5Description=http://sigma.octopart.com:80/rohs_statement/Yageo-company-2.pdf?src-supplier=Compliance+Statements, ComponentLink5URL=http://sigma.octopart.com:80/rohs_statement/Yageo-company-2.pdf?src-supplier=Compliance+Statements, ComponentLink6Description=https://datasheet.octopart.com:443/AA0805FR-0710KL-Yageo-datasheet-178056446.pdf?src-supplier=IHS, ComponentLink6URL=https://datasheet.octopart.com:443/AA0805FR-0710KL-Yageo-datasheet-178056446.pdf?src-supplier=IHS, Composition="Thick Film", Contact Plating=Tin, Country of Origin="Mainland China, Taiwan", Depth=1.25mm, Export Control Classification Number (ECCN) Code=EAR99, Features="Anti-Sulfur, Automotive AEC-Q200, Moisture Resistant", Harmonized Tariff Schedule (HTS) Code=8533.21.00.30, Height=500µm, Introduction Date=2004-09-22, Length=2mm, Lifecycle Status=Production, Manufacturer Part Number=AA0805FR-0710KL, Military Standard=Not, Mount="Surface Mount", Number of Pins=2, Number of Terminals=2, Number of Terminations=2, Packaging="Tape & Reel", Power Dissipation=125mW, Power Rating=125mW, Pricing 1="1=0,1, 10=0,010, 50=0,010, 100=0,006, 1000=0,006, 10000=0,004 (USD)", Pricing 2="1=0,1, 10=0,015, 50=0,015, 100=0,015, 1000=0,015, 10000=0,012 (USD)", Radiation Hardening=No, REACH SVHC=Yes, Resistance=10kΩ, RoHS=Compliant, Schedule B=8533210045, Stock 1=25236, Stock 2=14567, Supplier 1=Mouser, Supplier 2=Mouser, Supplier Part Number 2=603-AA0805FR-0710KL, Termination=SMD/SMT, Tolerance=1%, Voltage Rating (DC)=150V, Width=1.25mm, Working Voltage=150V
U1: "Reguladores de voltaje de conmutación DCDC Conv HV Buck SOT563(STD) T&R 3K"

## Free pads (board coordinates)
  round 0 hole 181.1 unplated: 7(3991.35,1955.76)
  round 0 hole 150 unplated: 8(397,291) 8(397,3646) 8(7228,291) 8(7228,3646)

## Via types
v1: diameter 30, hole 20, Top Layer to Bottom Layer, 63 vias
v2: diameter 50, hole 28, Top Layer to Bottom Layer, 7 vias
v3: diameter 30, hole 15, Top Layer to Bottom Layer, 5 vias
v4: diameter 20, hole 10, Top Layer to Bottom Layer, 1 vias

## Nets (pads, with @x,y where several pads share a name; then routed paths per layer and width w, separated by ;. In a path a pad name is that pad's centre, name@x,y a point inside that pad or via, vN(x,y) a via of type N, cw(c..) or ccw(c..) an arc to the next point about the centre after c; other vN are vias at no path point)
5V: C1.1 C2.1 C4.1 C5.1 C10.1 C11.1 C12.1 C17.1 C18.1 C23.1 C24.1 C25.1 C31.2 C37.1 C38.1 C39.1 C40.1 C42.2 C43.2 C44.2 C45.2 C46.2 C47.2 C48.2 C49.2 DCDC1.2 DCDC2.2 DCDC3.2 DCDC4.2 J6.3 J7.3 J8.3 J9.3 L5.2 R1.2 R20.2 R21.2 R22.2 R23.2 T1.1 U2.1 U3.1 U4.1 U5.1 U6.14 U7.14 U9.14 U10.14 | length 82.9
  Top Layer w10: C47.2 1481,1424 1500,1405 1500,1384.63 U9.14
12V: C3.2 D5.2 J1.2 J1.4 U1.1 | length 1513
  Top Layer w10: D5.2 1366.43,3551.43 1393,3578 1558,3578 1586.99,3549.01 C3.2 ; C3.2@1580.99,3500 1583.49,3497.5 U1.1@1702.5,3378.5
  Top Layer w20: J1.4@558.1,3219 907.52,3219 1210,3219 1367.43,3376.43 D5.2@1367.43,3500
-Vdc: C13.1 C14.1 C15.2 C16.2 C26.1 C27.1 C28.2 C29.2 C36.V- C41.1 DCDC2.4 DCDC4.4 J5.1 J5.2 J5.3 J5.4 R15.1 R26.2 R28.2 T27.1 T29.1 U3.8 U5.8 U8.13
  other v2: 3801,685 2872,910 3261,1014
  other v3: 3364,805 3165,2987 3229,3158
A: C6.1 C7.1 C8.2 C9.2 DCDC1.4 J3.1 J3.2 J3.3 J3.4 R25.2 T26.1 U2.8 U8.2
  other v3: 4180,2995
  other v4: 4343,3168
B: C19.1 C20.1 C21.2 C22.2 DCDC3.4 J4.1 J4.2 J4.3 J4.4 R27.2 T28.1 U4.8 U8.7
  other v2: 4914,685 3980,907 4320,992
  other v3: 4501,806
Enable_a: J7.1 R14.2 R21.1 T10.1 U6.5 U7.2 U7.5 U7.9 | length 2902.4
  Top Layer w10: R21.1 756,2234 798,2192 ; T10.1 801.21,2043.79 745.36,2043.79 597.15,2192 602.58,2192 798,2192 ; R14.2 938.02,2270.51 859.5,2192 798,2192 ; v1(1019,2342) 1015.17,2338.17 1007.65,2338.17 939.98,2270.51 1016,2270.51 1132.51,2154 1649,2154 1808.82,2313.82 U7.9 ; v1(1166.41,2341.41) U6.5 1363.59,2341.41 1460,2245 1526,2245 1558,2277 1558,2312 1585.41,2339.41 U7.5 1718.41,2339.41 1740,2361 1740,2389 1712.82,2416.18 U7.2
  Bottom Layer w10: v1@1019.59,2341.41 v1(1166.41,2341.41)
Enable_b: J9.1 R19.2 R23.1 T20.1 U9.5 U10.2 U10.5 U10.12 | length 1951
  Top Layer w10: T20.1 674.15,755 590.15,839 592,840.85 694.85,840.85 737,883 R23.1 765.49,960.49 889.51,1084.51 R19.2 978.51,1084.51 1176,1282 U9.5@1265,1282 ; U9.5 1373.35,1281.41 1443.39,1211.37 1526.64,1211.37 1562.88,1247.61 1562.88,1283.79 ; U10.2 1601.09,1358.18 1562.88,1319.96 1562.88,1283.79 ; U10.12 1764.33,1332.59 1713.15,1281.41 U10.5 1565.25,1281.41 1562.88,1283.79
G1: R2.2 R3.2 R25.1 T7.1 U8.1
G2: R4.2 R5.2 R26.1 T11.1 U8.9@3597.65,2605.36
G3: R6.2 R7.2 R27.1 T14.1 U8.8
G4: R8.2 R9.2 R28.1 T21.1 U8.16
GND: C1.2 C2.2 C3.1 C4.2 C10.2 C11.2 C17.2 C23.2 C24.2 C31.1 C32.1 C33.1 C34.1 C35.1 C37.2 C38.2 C39.2 C40.2 C42.1 C43.1 C44.1 C45.1 C46.1 C47.1 C48.1 C49.1 J1.1 J1.3 J6.2 J7.2 J8.2 J9.2 L1.1 L2.1 L3.1 L4.1 R10.1 R13.1 R14.1 R18.1 R19.1 R24.1 T22.1 T23.1 T24.1 T25.1 U1.3 U2.3 U2.4 U3.3 U3.4 U4.3 U4.4 U5.3 U5.4 U6.7 U7.7 U9.7 U10.7 | length 1439.4
  Top Layer w10: J1.3 J1.1 985.52,3499 R24.1 1161,3501.43 v2(1161,3588) ; J9.2@590.15,939 J9.2@596.26,939 ; v1(938,2140) 938.5,2140.5 938.5,2208.99 R14.1 ; v1(947,1514) 947.5,1513.5 947.5,1446.01 R18.1 ; R19.1 949.5,1022.99 949.5,955.5 v1(950,955) ; R13.1 974.74,2734.26 1034.26,2734.26 v1(1035,2735) ; v1(1265,1157) 1265,1228.37 U9.7 ; U6.7 1267,2290.09 v1(1267,2224) ; v1(1592,2227) 1622,2257 1622,2288.09 U7.7 ; v1(1621,1134) 1621,1229.37 U10.7 ; v1(1636.27,3346.73) 1641.68,3346.73 1651.1,3337.31 U1.3 ; v1(1692,3497) 1739.98,3449 R10.1
  other v1: 2715.79,312.99 3432,314 3822,316 4486,324 663,900 654,1521 1412,1637 1778,1647 657,2249 1441,2688 1760,2690 647.54,2758.99 4660.05,3407.52 3628,3411 1461,3432 4637,3594 3541,3613 3623,3615 4390,3636
nEnable_a: U6.6 U7.12 | length 715
  Top Layer w10: U6.6 1322.18,2315.82 1439,2199 1619,2199 1810.59,2390.59 U7.12
nEnable_b: U9.6 U10.9 | length 660.1
  Top Layer w10: U9.6 1266.95,1255.91 1328.9,1255.91 v1(1351.29,1233.52) ; v1(1679,1168) 1734,1223 1800.56,1223 1833.38,1255.82 U10.9
  Bottom Layer w10: v1(1351.29,1233.52) 1416.81,1168 v1(1679,1168)
NetC5_2: C5.2 DCDC1.1 L1.2
NetC12_2: C12.2 DCDC2.1 L2.2
NetC18_2: C18.2 DCDC3.1 L3.2
NetC25_2: C25.2 DCDC4.1 L4.2
NetC30_1: C30.1 L5.1 U1.2 | length 585.1
  Top Layer w10: U1.2@1701.83,3357.31 1668.11,3357.31 1648.69,3376.73 1619.73,3376.73 1600.49,3357.49 1600.49,3340.08 1623.84,3316.73 1739.44,3316.73 1759.44,3296.73 1788.82,3296.73 1835,3250.55 1835,3186.61 1881.18,3232.79 1910.3,3232.79 1924,3246.49 C30.1
NetC30_2: C30.2 U1.4 | length 185.8
  Top Layer w10: U1.4 1813.69,3337.31 1832,3319 1911.53,3319 C30.2
NetD1_1: D1.1 R11.2 U6.12 | length 397.8
  Top Layer w10: v1(1431,2393) 1431.2,2392.8 1498.94,2392.8 U6.12 ; v1(1572,2495) 1600,2523 R11.2 1627.25,2523.24 1627.25,2581.76 D1.1
  Bottom Layer w10: v1(1431,2393) 1504,2393 1572,2461 v1(1572,2495)
NetD3_1: D3.1 R16.2 U9.12 | length 448.4
  Top Layer w10: v1(1423.54,1328.18) 1426.47,1331.11 1497.67,1331.11 U9.12 ; v1(1600,1453) 1600,1454 1604,1458 R16.2 1657.49,1517.05 1661.44,1521 D3.1
  Bottom Layer w10: v1(1423.54,1328.18) 1424.35,1329 1504,1329 1598,1423 1598,1451 v1(1600,1453)
NetD5_1: D5.1 R24.2 | length 71.9
  Top Layer w10: R24.2 D5.1@1300.25,3499
  Top Layer w40: D5.1@1295.25,3499 1295.57,3499.31 D5.1
NetR1_1: R1.1 R10.2 U1.6 | length 124.8
  Top Layer w10: U1.6 1751.91,3377.59 1800.08,3377.59 R1.1 1803.74,3386.74 1803.74,3445.26 R10.2
NetR2_1: R2.1 U2.7 | length 228.2
  Top Layer w35: R2.1@4417.37,3066.14 4498,3146.77 U2.7
  Top Layer w39.37: R2.1 R2.1@4417.37,3066.14
NetR3_1: R3.1 U2.6 | length 155.9
  Top Layer w10: R3.1@4548,3067.14 R3.1
  Top Layer w35: R3.1@4548,3067.14 U2.6
NetR4_1: R4.1 U3.7 | length 159.5
  Top Layer w35: R4.1 U3.7
NetR5_1: R5.1 U3.6 | length 203.9
  Top Layer w35: U3.6 3519,3169 R5.1@3626,3062
NetR6_1: R6.1 U4.7 | length 211
  Top Layer w35: U4.7 4701,857.06 4708.11,864.16 R6.1@4733,864.16
NetR7_1: R7.1 U4.6 | length 225.6
  Top Layer w35: R7.1@4581.34,864.16 4604.59,864.16 4610,858.75 4610,786 4651,745 U4.6
NetR8_1: R8.1 U5.7 | length 204.4
  Top Layer w35: U5.7 3588,828.86 R8.1
NetR9_1: R9.1 U5.6 | length 217.4
  Top Layer w35: R9.1 3538,800.86 U5.6
nSa: D2.1 R12.2 U6.2 U6.13 U7.10 | length 1565.8
  Top Layer w10: D2.1@1310.02,2582.54 1310.02,2517.47 1329.18,2498.31 1329.18,2418.18 ; U6.13 1329.18,2418.18 ; U7.10 1795.41,2339.41 1632,2176 1149,2176 1108,2217 1107.86,2217 1102,2222.86 1102,2353 1167.18,2418.18 U6.2 1329.18,2418.18
nSa*: S1.1 T2.1 U7.6 | length 839.9
  Top Layer w10: U7.6 1689.18,2313.82 v1(1690,2313) ; T2.1 2075.31,2201 2142.29,2267.98 2142.29,2273.98 2149.1,2280.8 S1.1@2155.1,2280.8 ; S1.1@2155.55,2280.8 2155.55,2226.45 v1(2156,2226)
  Bottom Layer w10: v1(1690,2313) 1967.69,2313 1970.58,2310.25 2059.21,2226 v1(2156,2226)
nSa_dt: C33.2 D2.2 R12.1 U7.4 | length 529.8
  Top Layer w10: D2.2@1361.98,2582.54 1363.75,2580.78 1363.75,2524.76 R12.1 ; v1(1383,2454) 1383,2459.41 1365.51,2476.9 R12.1 ; C33.2@1433,2521 1432,2522 1366.51,2522 R12.1 ; v1(1560,2365) U7.4
  Bottom Layer w10: v1(1383,2454) 1381,2452 1381,2376 1392,2365 v1(1560,2365)
nSb: D4.1 R17.2 U9.2 U9.13 U10.13 | length 1230.3
  Top Layer w10: U9.2 1301.18,1358.18 ; v1(1289,1622) 1289,1522.87 D4.1@1291.87,1520 ; D4.1 D4.1@1291.87,1520 ; U9.13 1301.18,1358.18 ; v1(1776,1457) 1776,1396 1813.82,1358.18 U10.13 ; D4.1@1291.87,1520 1290.44,1520 1285.49,1515.05 R17.2 1316.49,1430 1316.49,1373.49 1301.18,1358.18
  Bottom Layer w10: v1(1289,1622) 1356,1555 1678,1555 v1(1776,1457)
nSb*: S2.4 T12.1 U10.3 | length 876.5
  Top Layer w10: U10.3 1623.33,1331.11 1690.89,1331.11 v1(1694,1328) ; T12.1 2072,1477 2072,1426 2113.22,1384.78 2149.55,1384.78 2149.55,1450.55 v1(2150,1451)
  Bottom Layer w10: v1(1694,1328) 1817,1451 v1(2150,1451)
nSb_dt: C35.2 D4.2 R17.1 U10.1 | length 586.7
  Top Layer w10: D4.2 1345.25,1518.74 1345.25,1462.26 R17.1 1346.78,1460.73 1412.73,1460.73 1410.5,1458.5 1410.5,1396.5 v1(1408,1394) ; v1(1556,1508) 1556,1429.94 1602.17,1383.77 U10.1
  Bottom Layer w10: v1(1408,1394) 1499,1394 1556,1451 v1(1556,1508)
S1: S1.5 T6.1 U2.2 | length 3567.6
  Top Layer w10: T6.1 2224,2750 ; S1.5@2224,2497.33 2224,2750 ; v1(2224,3039) 2224,2750 ; U2.2 4504.81,3415.81 4504.81,3441.81 4516.92,3453.92 4561.92,3453.92 4579.17,3471.17 4579.17,3484.17 v1(4583,3488)
  Bottom Layer w10: v1(2224,3039) 2224,3222 2541,3539 4532,3539 v1(4583,3488)
S2: S1.2 T5.1 U3.2 | length 2588.2
  Top Layer w10: T5.1 2162.6,2126.6 2162.6,2184.5 2224,2245.9 2224,2296.54 2394,2466.54 v1(2394,3033) ; U3.2 3475.81,3415.81 3475.81,3435.81 3494,3454 3518,3454 3556,3492 v1(3556,3494)
  Bottom Layer w10: v1(2394,3033) 2394,3189 2699,3494 v1(3556,3494)
S3: S2.2 T16.1 U4.2 | length 3840.2
  Top Layer w10: T16.1 2203,770 v1(2217,770) 2217.5,770.5 2217.5,1175.17 S2.2 S2.2@2218,1167.8 ; U4.2 4701,511.71 4744.29,555 4905,555 v1(4908,558)
  Bottom Layer w10: v1@2218,770 2218,547 2373,392 4745,392 4908,555 v1(4908,558)
S4: S2.5 T17.1 U5.2 | length 2685.5
  Top Layer w10: T17.1 2181,1639.61 2218,1602.61 2218,1421 ; S2.5 2218,1421 ; v1(2259,1462) 2218,1421 ; v1(3365,507) 3368,507 3411,550 3571,550 3588,533 U5.2
  Bottom Layer w10: v1(2259,1462) 2259,579 2375,463 3321,463 v1(3365,507)
Sa: J6.1 R13.2 R20.1 T4.1 U6.1 U7.13 | length 2063.6
  Top Layer w10: T4.1@801.5,2587.5 T4.1 706.15,2587 597.15,2696 718,2696 775,2753 775,2812.49 R20.1 777.98,2814.49 919.98,2672.49 R13.2 R13.2@974.5,2671.99 ; R13.2@974,2671 1039.63,2671 U6.1 1266.86,2570.14 v1(1265,2572) ; v1(1815,2570) 1797,2552 1797,2505.35 1779,2487.35 1779,2447 1809.82,2416.18 U7.13
  Bottom Layer w10: v1(1265,2572) 1266,2571 1814,2571 v1(1815,2570)
Sa*: S1.4 T3.1 U7.3 | length 891
  Top Layer w10: U7.3 1687.59,2390.59 v1(1688,2391) ; T3.1 2097,2555.43 2140.42,2512.02 2142.29,2512.02 S1.4@2155.05,2499.26 ; v1(2155,2570) 2155.05,2569.95 S1.4@2155.05,2499.26 ; S1.4@2155.05,2497.38 S1.4@2155.05,2499.26
  Bottom Layer w10: v1(1688,2391) 1766,2469 2054,2469 v1(2155,2570)
Sa_dt: C32.2 D1.2 R11.1 U7.1 | length 298.6
  Top Layer w10: U7.1 1675.77,2441.77 1755.73,2521.73 1689.78,2521.73 R11.1 1683.43,2528.08 1683.43,2579.13 1680.56,2582 D1.2
San*: S1.3 T8.1 U7.8 | length 926.2
  Top Layer w10: U7.8 1854.14,2208.86 2002,2061 2002,2060.86 2007.86,2055 2204,2055 2292.9,2143.9 S1.3@2292.9,2280.8 ; S1.3@2292.9,2288.67 S1.3@2292.9,2280.8 ; T8.1 2363.19,2149.81 2363.19,2210.5 S1.3@2292.9,2280.8
Sap*: S1.6 T9.1 U7.11 | length 721.6
  Top Layer w10: U7.11 1923,2365 2006,2448 2243.57,2448 2292.9,2497.33 2292.9,2505.2 2318,2530.31 T9.1
Sb: J8.1 R18.2 R22.1 T15.1 U9.1 U10.10 | length 2096.1
  Top Layer w10: J8.1@598.15,1470 J8.1@606.1,1470 ; T15.1@802,1340 736.1,1340 J8.1@606.1,1470 ; R18.2@947.65,1383.14 U9.1@1266.23,1383.14 ; R18.2 813,1519.49 813,1558.49 R22.1 783,1511.35 741.65,1470 J8.1@606.1,1470 ; v1(1223,1546) 1222,1545 1222,1428.63 U9.1 ; v1(1782,1258) 1787.09,1258 1809.29,1280.2 1852.94,1280.2 U10.10
  Bottom Layer w10: v1(1223,1546) 1223,1486.29 1451.29,1258 v1(1782,1258)
Sb*: S2.1 T13.1 U10.6 | length 958.2